# Altium PCB ali_sedighin.PcbDoc
Units mm, origin at the board's own origin, x right, y up, seen from the top; angles counter-clockwise.
Board outline 91.56 x 65.16 mm, 2 copper layers (Top Layer, Bottom Layer); 28 components, 23 nets, 114 pads, 36 vias.
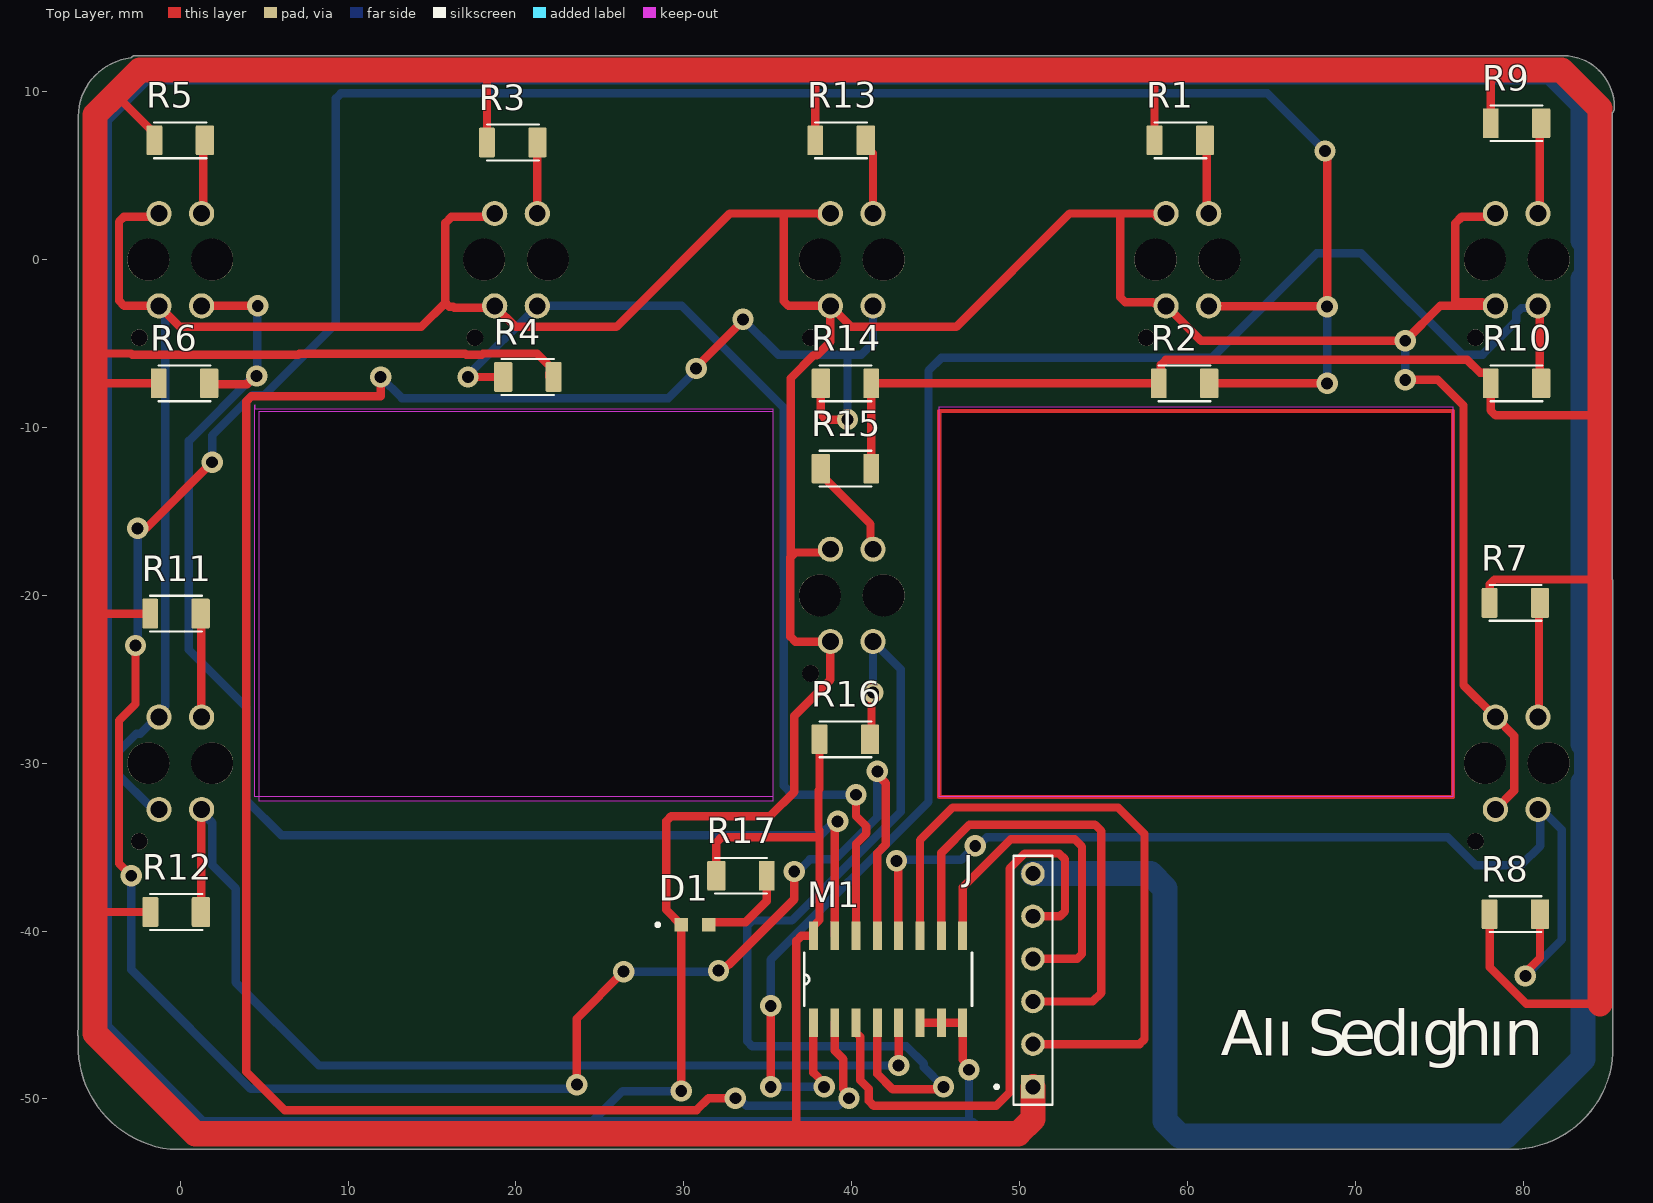
[diagram p0: Top Layer view]
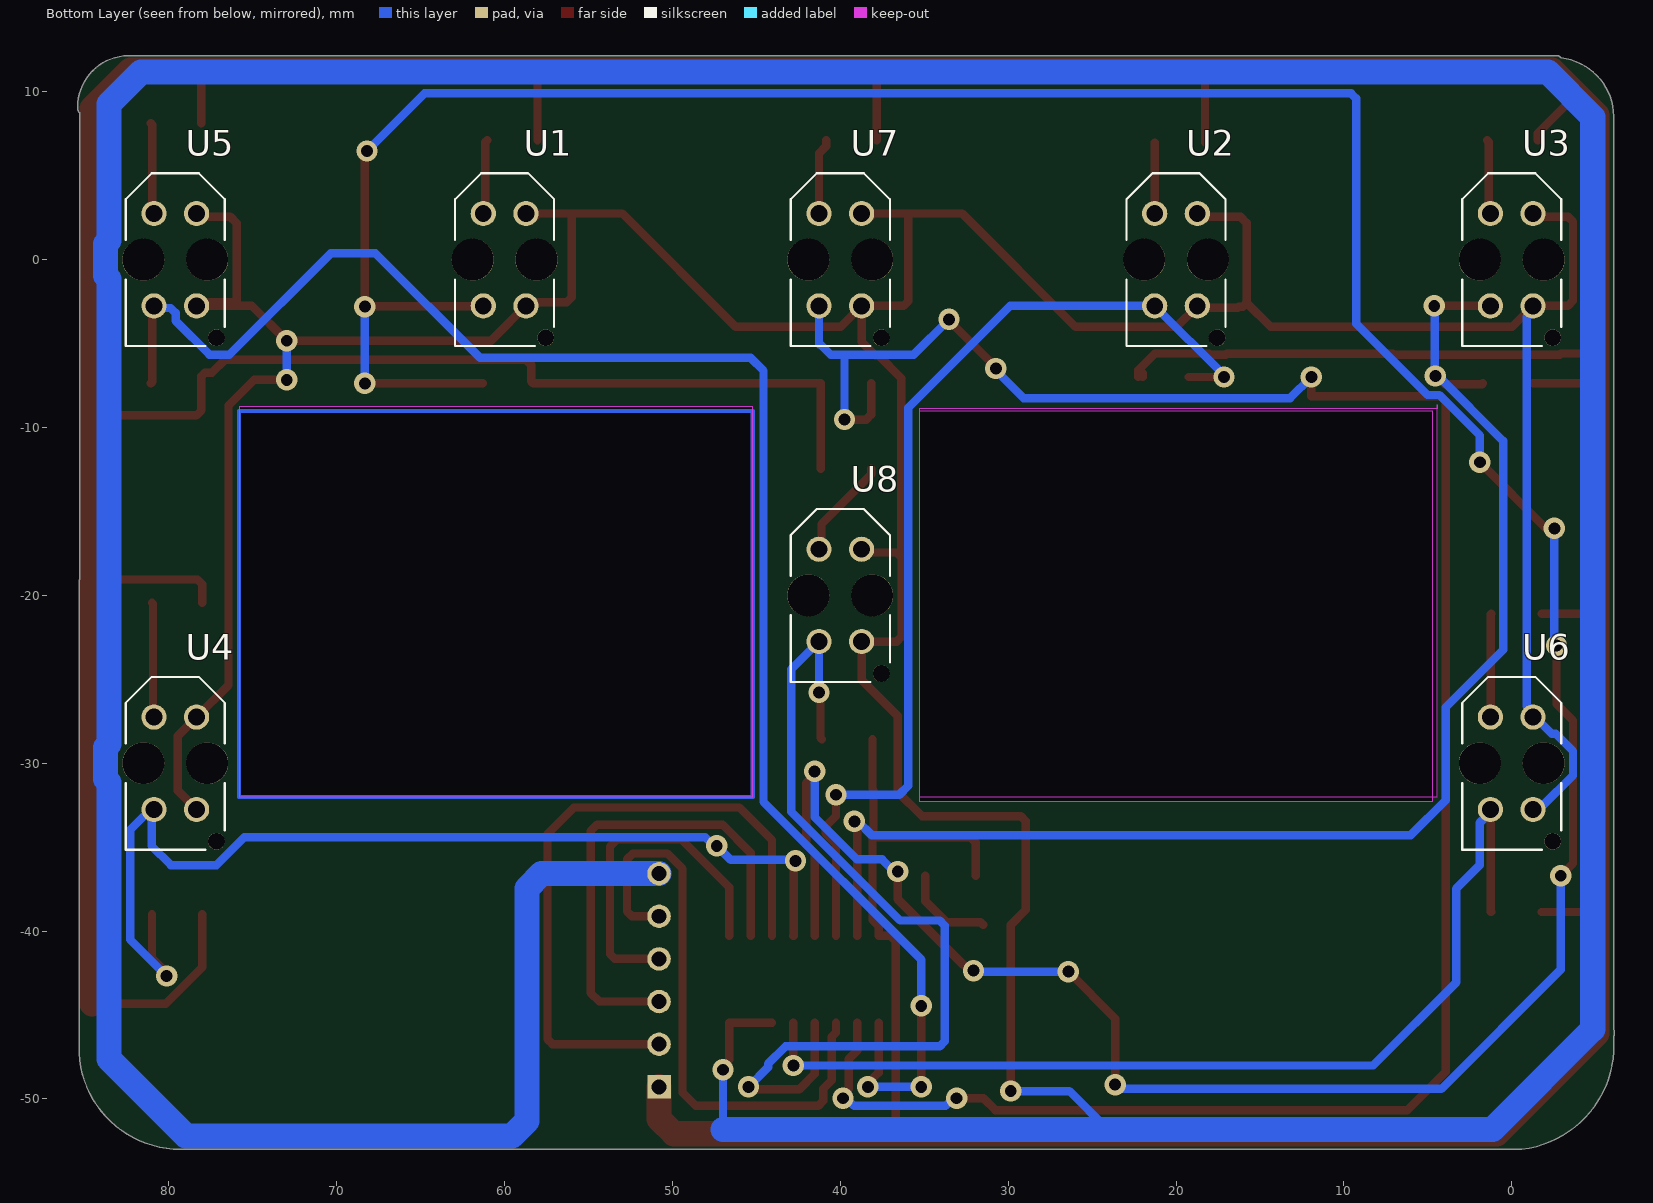
[diagram p1: Bottom Layer view, seen from below]
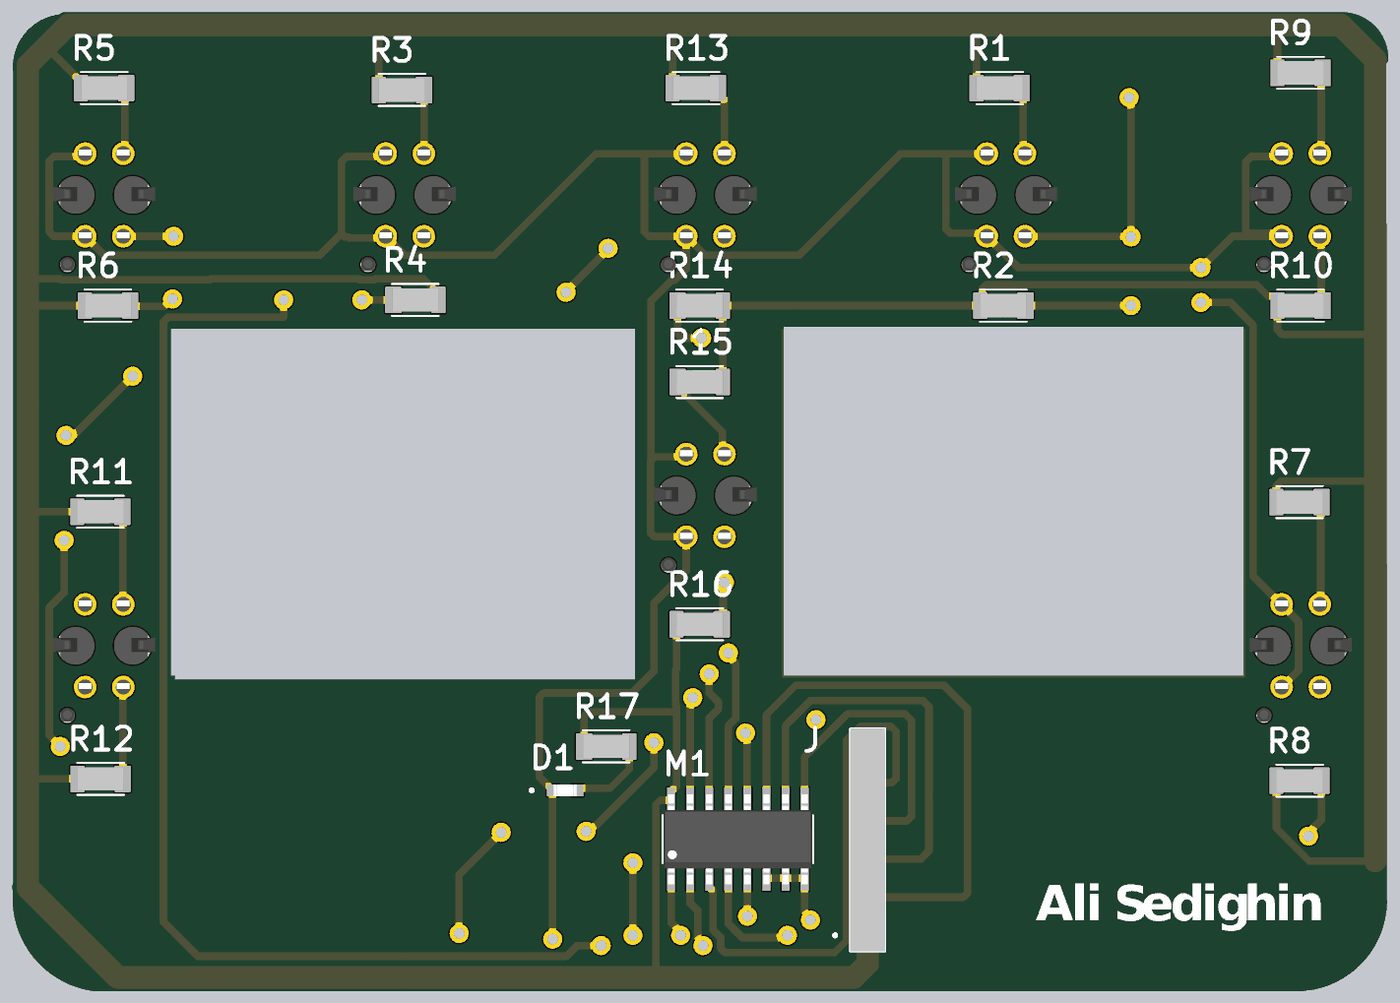
[diagram p2: 3D render of the assembled board from above, using the file's embedded part models]
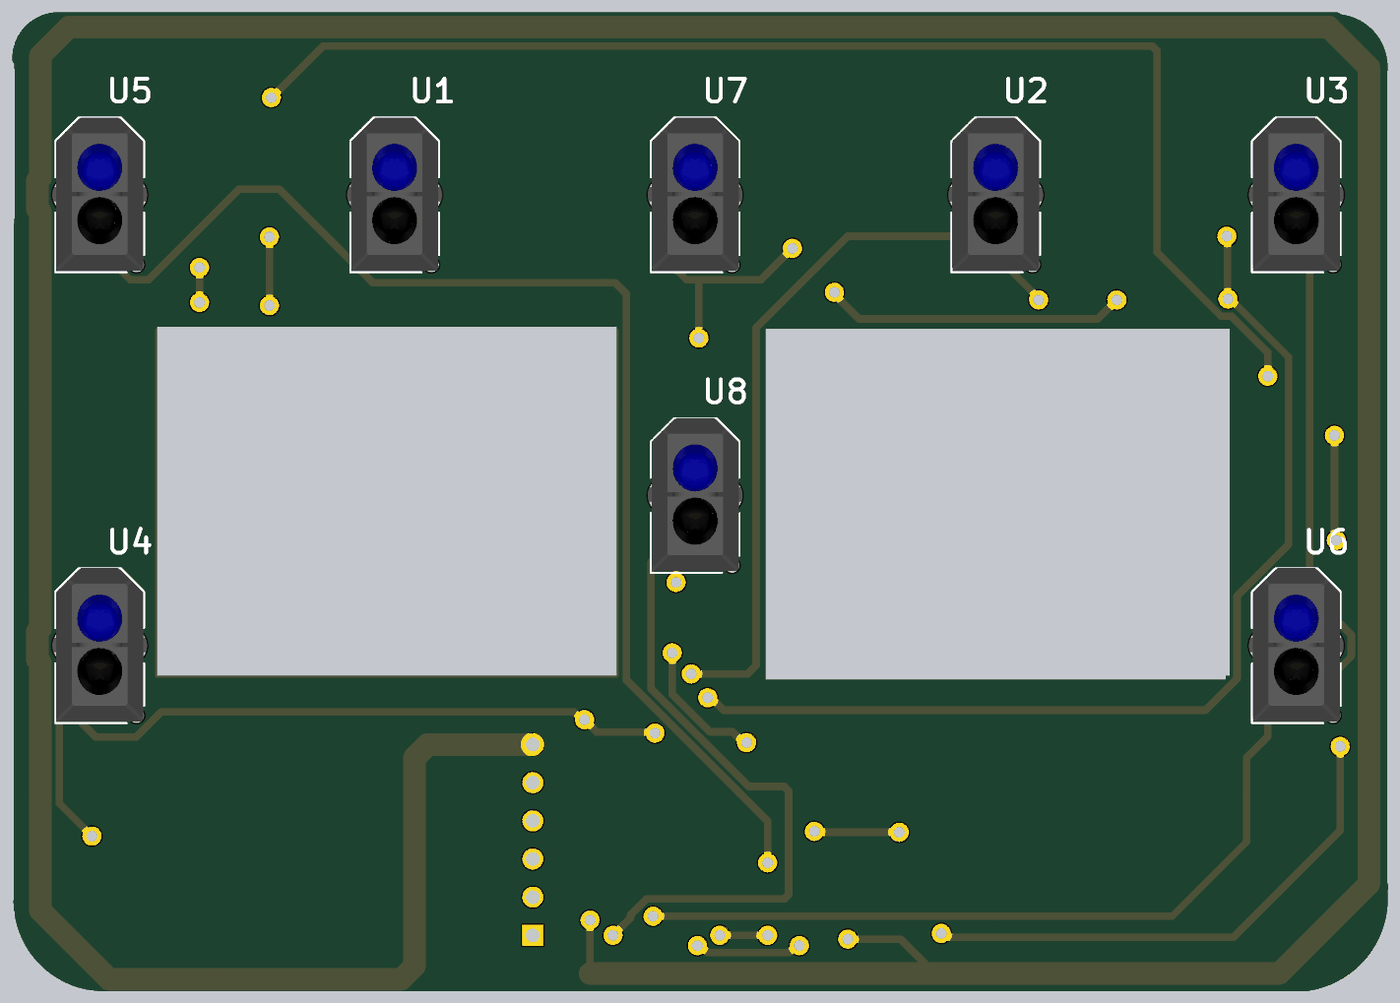
[diagram p3: 3D render of the assembled board from below, using the file's embedded part models]

## Layer stack, top to bottom
Top Solder: solder mask 0.0102, Solder Resist, Dk 3.5
Top Layer: signal copper 0.0356
Dielectric 1: dielectric 0.32, FR-4, Dk 4.8
Bottom Layer: signal copper 0.0356
Bottom Solder: solder mask 0.0102, Solder Resist, Dk 3.5

## Board outline
-0.608,-52.999 cw(c0.127,-46.824) -6.07,-46.296 cw(c-5.584,-46.071) -6.065,-45.836 -6.065,8.242 cw(c-2.54,8.509) -2.947,12.021 cw(c-2.667,11.811) -2.667,12.161 82.424,12.161 cw(c82.427,12.079) 82.432,12.161 cw(c82.36,9.081) 85.44,9.081 cw(c83.759,9.07) 85.44,9.033 cw(c85.248,9.021) 85.44,9.017 cw(c85.091,9.017) 85.313,8.747 85.354,-46.873 cw(c79.317,-46.961) 79.317,-52.999
cut-out: 45.212,-8.763 75.819,-8.763 75.819,-32.004 45.212,-32.004
cut-out: 4.699,-9.017 35.306,-9.017 35.306,-32.258 4.699,-32.258
cut-out: 4.445,-8.89 35.306,-8.89 35.306,-32.004 4.445,-32.004 4.445,-8.636

## Design rules (kind name [scope] priority, off if disabled: settings)
Clearance [All] p1: gap=0.254 ignorepadtopadclearanceinfootprint=FALSE except(0: Arc-Hole Track-Hole SMDPad-Hole THPad-Hole Via-Hole Fill-Hole Poly-Hole Region-Hole Text-Hole)
PolygonConnect [All] p1: connectstyle=Relief reliefconductorwidth=0.254 reliefentries=4 polygonreliefangle="90 Angle" airgapwidth=0.254
RoutingVias [All] p1: holewidth=0.711 width=1.27 viastyle="Through Hole" minholewidth=0.711 minwidth=1.27 maxholewidth=0.711 maxwidth=1.27
SolderMaskExpansion [All] p1: expansion=0.102 istentingtop=FALSE
Width [All] p1: maxlimit=1.5 minlimit=0.5 preferedwidth=1
30 further rules are at their usual default settings.

## Components (designator, comment, footprint, x,y, rotation, side; value= is the part's Value field where it differs from the comment)
D1 "KPT-1608ZGC" LED_KPT-1608ZGC 30.67,-39.624 r0 top
J "103321-6" TE_103321-6 50.8,-42.926 r90 top
M1 "74HC4051D" SOIC127P600X175-16N 42.164,-42.875 r90 top
R1 "" RESC3115X65N 59.579,7.112 r180 top
R2 "" RESC3115X65N 59.833,-7.366 r180 top
R3 "" RESC3115X65N 19.812,6.985 r180 top
R4 "" RESC3115X65N 20.701,-6.985 r0 top
R5 "" RESC3115X65N -0.001,7.112 r180 top
R6 "" RESC3115X65N 0.253,-7.366 r180 top
R7 "" RESC3115X65N 79.542,-20.447 r180 top
R8 "" RESC3115X65N 79.542,-38.989 r180 top
R9 "" RESC3115X65N 79.609,8.128 r180 top
R10 "" RESC3115X65N 79.609,-7.366 r180 top
R11 "" RESC3115X65N -0.254,-21.082 r180 top
R12 "" RESC3115X65N -0.238,-38.862 r180 top
R13 "" RESC3115X65N 39.37,7.112 r180 top
R14 "" RESC3115X65N 39.624,-7.366 r0 top
R15 "" RESC3115X65N 39.624,-12.446 r0 top
R16 "" RESC3115X65N 39.624,-28.575 r180 top
R17 "1879462-3" RESC3115X65N 33.401,-36.703 r0 top
U1 "TCRT5000" OPTO_TCRT5000 60,0 r90 bottom
U2 "TCRT5000" OPTO_TCRT5000 20,0 r90 bottom
U3 "TCRT5000" OPTO_TCRT5000 0,0 r90 bottom
U4 "TCRT5000" OPTO_TCRT5000 79.619,-30 r90 bottom
U5 "TCRT5000" OPTO_TCRT5000 79.619,0 r90 bottom
U6 "TCRT5000" OPTO_TCRT5000 0,-30 r90 bottom
U7 "TCRT5000" OPTO_TCRT5000 40,0 r90 bottom
U8 "TCRT5000" OPTO_TCRT5000 40,-20 r90 bottom

## Footprints (in the part's own frame and the unit in brackets; to place one, negate y for a bottom-side part, rotate by r counter-clockwise, add the part's x,y. Pads: shape width x height; smd on the part's side, far side on the other; paste and mask are expansions set on the pad)
LED_KPT-1608ZGC [mm]
  rect 0.8x0.8 smd: 1(0.825,0) 2(-0.825,0)
  silkscreen extent -2.32,-0.1 -2.12,0.1, body extent -0.8,-0.4 0.8,0.4, height 1.1
OPTO_TCRT5000 [mm]
  round 1.5 hole 1: A(2.75,1.27) CATH(2.75,-1.27) COLL(-2.75,1.27) E(-2.75,-1.27)
  round 1 hole 1 unplated: ""(-4.65,-2.45)
  round 2.5 hole 2.5 unplated: ""(0,-1.9) ""(0,1.9)
  silkscreen extent -5.15,-2.95 5.15,2.95, body extent -5.04,-3.4 5.16,3.4, height 7.2
RESC3115X65N [mm]
  rrect14% 1.09x1.77 smd: 1(-1.465,0)
  rrect14% 0.94x1.77 smd: 2(1.54,0)
  silkscreen extent -1.55,-1.06 1.55,1.06, body extent -1.55,-0.77 1.55,0.77, height 0.53
SOIC127P600X175-16N [mil]
  rect 67x21 smd: 1(-102,175) 2(-102,125) 3(-102,75) 4(-102,25) 5(-102,-25) 6(-102,-75) 7(-102,-125) 8(-102,-175) 9(102,-175) 10(102,-125) 11(102,-75) 12(102,-25) 13(102,25) 14(102,75) 15(102,125) 16(102,175)
  silkscreen extent -62,-197 62,197, body extent -118,-195 118,195, height 69
TE_103321-6 [mm]
  rect 1.398x1.398 hole 0.89: 1(-6.35,0)
  round 1.398 hole 0.89: 2(-3.81,0) 3(-1.27,0) 4(1.27,0) 5(3.81,0) 6(6.35,0)
  silkscreen extent -7.42,-1.17 7.42,2.27, body extent -7.42,-1.17 7.42,1.17, height 10.58

## Part data
D1: "1.6x0.8mm Smd Chip Led Lamp", Package="0603 Kingbright", Availability="In Stock", Check_prices=https://www.snapeda.com/parts/KPT-1608ZGC/Kingbright/view-part/?ref=eda, MF=Kingbright, MP=KPT-1608ZGC, Price=None, SnapEDA_Link=https://www.snapeda.com/parts/KPT-1608ZGC/Kingbright/view-part/?ref=snap
J: "Pin 06 MODII HDR SRST B / A .100CL 6 POS", Package=None, Availability=Unavailable, MF="TE Connectivity", Mouser-Purchase-URL=https://snapeda.com/shop?store=Mouser&id=4238467, MP=103321-6, Price=None, SnapEDA_Link=https://www.snapeda.com/parts/103321-6/TE%20Connectivity/view-part/4238467/?ref=snap
M1: "1 Circuit IC Switch 8:1 130Ohm 16-SOIC", Package="SOIC-16 Toshiba", Availability="In Stock", Check_prices=https://www.snapeda.com/parts/74HC4051D/Toshiba/view-part/?ref=eda, MF=Toshiba, MP=74HC4051D, Price=None, Purchase-URL=https://pricing.snapeda.com/search/part/74HC4051D/?ref=eda, SnapEDA_Link=https://www.snapeda.com/parts/74HC4051D/Toshiba/view-part/?ref=snap
R1 R2 R3 R4 R5 R6 R7 R8 R9 R10 R11 R12 R13 R14 R15 R16: library part 1879462-3, "RL73H 2B R12 1% 5K RL", Package=None, Availability=Unavailable, MP=1879462-3, Price=None
R17: "RL73H 2B R12 1% 5K RL", Package=None, Availability=Unavailable, MP=1879462-3, Price=None
U1 U2 U3 U4 U5 U6 U7 U8: "950 nm 60 mA Through Hole Reflective Optical Sensor with Transistor Output", Package=None, Availability=Unavailable, MP=TCRT5000, Price=None

## Via types
v1: diameter 1.27, hole 0.711, Top Layer to Bottom Layer, 36 vias

## Nets (pads, with @x,y where several pads share a name; then routed paths per layer and width w, separated by ;. In a path a pad name is that pad's centre, name@x,y a point inside that pad or via, vN(x,y) a via of type N, cw(c..) or ccw(c..) an arc to the next point about the centre after c; other vN are vias at no path point)
+5: J.1 M1.16 R1.2 R2.2 R3.2 R4.2 R5.2 R6.2 R7.2 R8.2 R9.2 R10.2 R11.2 R12.2 R13.2 R14.2 R15.2 R16.2 R17.1 | length 422.9
  Top Layer w0.5: -5.08,-38.862 R12.2 ; -5.08,-21.209 -4.953,-21.082 R11.2 ; -5.08,-7.366 R6.2 ; -5.08,-5.588 -2.932,-5.588 -2.866,-5.654 7.027,-5.654 7.089,-5.592 16.982,-5.592 17.044,-5.654 17.966,-5.654 18.032,-5.588 21.259,-5.588 22.241,-6.57 R4.2 ; -3.746,9.97 -3.746,9.732 -1.541,7.527 R5.2 ; 17.716,11.303 18.272,10.747 R3.2 ; R4.2@21.987,-6.985 R4.2@21.987,-6.765 ; R17.1 31.936,-34.71 32.229,-34.417 37.957,-34.417 38.084,-34.29 ; 36.703,-52.07 36.703,-40.577 36.996,-40.284 M1.16 37.719,-39.7 38.084,-39.335 38.084,-34.29 ; R13.2 37.83,11.287 37.846,11.303 ; R16.2 38.084,-31.541 38.025,-31.6 38.025,-33.932 38.084,-33.991 38.084,-34.29 ; R15.2 R14.2 R2.2 58.42,-7.239 58.42,-6.262 58.713,-5.969 76.672,-5.969 77.434,-6.731 77.849,-6.731 78.069,-6.951 R10.2 78.069,-8.978 78.362,-9.271 84.455,-9.271 84.582,-9.398 ; 57.912,11.303 58.039,11.176 R1.2 ; 77.978,11.303 78.069,11.212 R9.2 ; R8.2 78.002,-42.148 80.177,-44.323 84.582,-44.323 ; R7.2 78.002,-19.343 78.295,-19.05 84.455,-19.05 84.582,-19.177
  Top Layer w1.5: J.1 50.8,-51.191 49.921,-52.07 36.703,-52.07 0.889,-52.07 -5.08,-46.101 -5.08,-38.862 -5.08,-21.209 -5.08,-7.366 -5.08,-5.588 -5.08,8.636 -3.746,9.97 -2.413,11.303 17.716,11.303 18.272,11.303 37.846,11.303 57.912,11.303 77.978,11.303 82.296,11.303 84.582,9.017 84.582,-9.398 84.582,-19.177 84.582,-44.323
ARDU1: J.2 M1.11 | length 39.5
  Top Layer w0.5: M1.11 44.069,-34.579 46.013,-32.635 55.876,-32.635 57.443,-34.202 57.443,-46.443 57.15,-46.736 J.2
ARDU2: J.3 M1.10 | length 29.3
  Top Layer w0.5: M1.10 45.339,-35.333 47.017,-33.655 54.483,-33.655 54.872,-34.044 54.872,-43.68 54.356,-44.196 J.3
ARDU3: J.4 M1.9 | length 20.8
  Top Layer w0.5: M1.9 46.609,-37.398 49.471,-34.536 53.293,-34.536 53.721,-34.964 53.721,-41.363 53.428,-41.656 J.4
GND: D1.2 J.6 M1.6 M1.7 M1.8 U1.CATH U1.E U2.CATH U2.E U3.CATH U3.E U4.CATH U4.E U5.CATH U5.E U6.CATH U6.E U7.CATH U7.E U8.CATH U8.E | length 579.9
  Top Layer w0.5: U3.CATH -1.461,2.559 -3.361,2.559 -3.654,2.266 -3.654,-2.442 -3.346,-2.75 U3.E -0.016,-4.004 14.349,-4.004 15.788,-2.565 ; U2.CATH 18.539,2.559 16.148,2.559 15.788,2.199 15.788,-2.565 ; v1(29.845,-49.53) D1.2 28.956,-38.735 28.956,-33.44 29.249,-33.147 35.13,-33.147 36.576,-31.701 36.576,-27.178 38.73,-25.024 U8.E 36.639,-22.75 36.346,-22.457 36.346,-17.734 36.639,-17.441 38.539,-17.441 U8.CATH ; 36.375,-17.705 36.375,-7.052 37.736,-5.691 37.928,-5.691 38.73,-4.89 U7.E ; U7.CATH@38.178,2.559 38.539,2.559 U7.CATH 38.539,2.75 38.178,2.75 35.941,2.75 ; M1.6 M1.7 M1.8 46.609,-47.671 ; U1.CATH@58.178,2.559 58.539,2.559 U1.CATH 58.539,2.75 58.178,2.75 56.007,2.75 ; v1(72.98,-7.157) 74.926,-7.157 76.45,-8.681 76.45,-25.351 U4.CATH 79.473,-28.374 79.473,-31.626 U4.E ; U5.E U5.E@78.22,-2.75 ; U5.CATH 78.158,2.559 76.346,2.559 75.965,2.178 75.965,-2.54 77.556,-2.54 77.575,-2.559 78.028,-2.559 U5.E@78.22,-2.75 ; 15.788,-2.565 16.017,-2.794 16.256,-2.794 16.32,-2.858 18.622,-2.858 U2.E 19.984,-4.004 25.98,-4.004 32.734,2.75 35.941,2.75 ; 35.941,2.75 35.941,-2.457 36.234,-2.75 U7.E ; U7.E 39.984,-4.004 46.228,-4.004 52.982,2.75 56.007,2.75 ; 56.007,2.75 56.007,-2.247 56.3,-2.54 57.937,-2.54 57.956,-2.559 58.539,-2.559 60.81,-4.83 v1(72.98,-4.83) 75.06,-2.75 75.965,-2.75 78.01,-2.75 U5.E@78.22,-2.75
  Bottom Layer w0.5: U6.E -1.461,-32.559 -1.822,-32.559 -3.654,-30.727 -3.654,-29.273 -2.627,-28.246 -2.395,-28.246 -1.399,-27.25 U6.CATH -1.27,-26.979 -0.889,-26.598 -0.889,-3.402 -1.27,-3.021 U3.E ; 24.066,-51.816 26.352,-49.53 v1(29.845,-49.53) ; 46.99,-51.816 v1(46.99,-48.26) ; v1(72.98,-7.157) v1(72.98,-4.83)
  Bottom Layer w1.5: 46.99,-51.816 24.066,-51.816 1.143,-51.816 -4.826,-45.847 -4.826,8.509 -2.159,11.176 81.661,11.176 83.566,9.271 83.566,1.141 83.773,0.934 83.773,-0.934 83.566,-1.141 83.566,-28.859 83.773,-29.066 83.773,-30.934 83.566,-31.141 83.566,-47.625 78.994,-52.197 59.553,-52.197 58.674,-51.318 58.674,-37.455 57.795,-36.576 J.6
NetD1_1: D1.1 R17.2 | length 5.5
  Top Layer w0.5: D1.1 31.645,-39.474 33.678,-39.474 34.941,-38.211 R17.2
NetR1_1: R1.1 U1.A | length 4.5
  Top Layer w0.5: R1.1 61.157,6.999 61.157,2.863 U1.A
NetR3_1: R3.1 U2.A | length 4.2
  Top Layer w0.5: U2.A 21.274,2.753 21.274,6.981 R3.1
NetR5_1: R5.1 U3.A | length 4.4
  Top Layer w0.5: U3.A 1.367,2.847 1.367,7.015 R5.1
NetR7_1: R7.1 U4.A | length 6.9
  Top Layer w0.5: U4.A 80.948,-27.191 80.948,-20.506 R7.1
NetR9_1: R9.1 U5.A | length 5.5
  Top Layer w0.5: U5.A 80.981,2.842 80.981,8.036 R9.1
NetR11_1: R11.1 U6.A | length 6.2
  Top Layer w0.5: R11.1 1.241,-21.111 1.241,-27.221 U6.A
NetR13_1: R13.1 U7.A | length 4.5
  Top Layer w0.5: R13.1 40.835,6.772 41.27,6.337 U7.A
NetR15_1: R15.1 U8.A | length 6.1
  Top Layer w0.5: R15.1 38.159,-12.786 41.123,-15.75 41.123,-17.103 U8.A
OUT: J.5 M1.3 | length 36.1
  Top Layer w0.5: M1.3 40.259,-46.05 40.513,-46.304 40.513,-48.895 41.021,-49.403 41.021,-50.122 41.314,-50.415 48.606,-50.415 49.399,-49.622 49.399,-36.276 50.302,-35.373 52.36,-35.373 52.705,-35.718 52.705,-38.823 52.412,-39.116 J.5
s1: M1.13 R2.1 U1.COLL | length 217.2
  Top Layer w0.5: v1(-2.921,-36.703) -3.654,-35.97 -3.654,-27.454 -2.667,-26.467 v1(-2.667,-22.987) ; v1(-2.54,-16.002) -2.04,-16.002 v1(1.897,-12.065) ; v1(23.622,-49.149) 23.622,-45.212 v1(26.416,-42.418) ; v1(32.067,-42.355) 32.276,-42.355 32.628,-42.002 32.674,-42.002 36.576,-38.1 v1(36.576,-36.449) ; M1.13 41.529,-35.346 42.027,-34.848 42.027,-31.187 41.529,-30.688 v1(41.529,-30.48) ; U1.COLL 61.292,-2.772 68.304,-2.772 v1(68.326,-2.794) 68.326,6.35 v1(68.199,6.477) ; R2.1 v1(68.326,-7.366)
  Bottom Layer w0.5: v1(-2.921,-36.703) -2.921,-42.291 4.191,-49.403 23.368,-49.403 v1(23.622,-49.149) ; v1(-2.667,-22.987) -2.54,-22.86 v1(-2.54,-16.002) ; v1(1.897,-12.065) 1.897,-10.471 4.306,-8.063 5.018,-8.063 9.271,-3.81 9.271,9.613 9.564,9.906 64.77,9.906 v1(68.199,6.477) ; v1(26.416,-42.418) 32.004,-42.418 v1(32.067,-42.355) v1@32.131,-42.291 ; v1(36.576,-36.449) 36.784,-36.449 37.506,-35.728 39.015,-35.728 41.529,-33.214 v1(41.529,-30.48) ; v1(68.326,-7.366) v1(68.326,-2.794)
s2: M1.14 R4.1 U2.COLL | length 61.2
  Top Layer w0.5: v1(17.145,-6.985) R4.1 ; M1.14 40.259,-34.798 40.877,-34.18 40.877,-33.765 40.259,-33.147 v1(40.259,-31.877)
  Bottom Layer w0.5: v1(17.145,-6.985) 17.145,-6.875 U2.COLL 29.879,-2.75 35.941,-8.812 35.941,-31.33 36.488,-31.877 v1(40.259,-31.877)
s3: M1.15 R6.1 U3.COLL | length 82.4
  Top Layer w0.5: U3.COLL v1(4.616,-2.75) ; R6.1 1.762,-7.41 3.991,-7.41 4.477,-6.924 v1(4.547,-6.924) ; M1.15 38.989,-33.843 39.164,-33.668 v1(39.164,-33.46)
  Bottom Layer w0.5: v1(4.547,-6.924) 4.378,-6.924 0.508,-10.794 0.508,-23.241 3.941,-26.674 3.941,-32.213 6.018,-34.29 38.125,-34.29 38.955,-33.46 v1(39.164,-33.46) ; v1@4.581,-6.889 4.581,-2.785 v1(4.616,-2.75)
s4: M1.12 R8.1 U4.COLL | length 62.4
  Top Layer w0.5: v1(42.672,-35.814) 42.782,-35.924 42.782,-40.268 M1.12 ; v1(80.137,-42.672) 80.137,-42.464 81.007,-41.593 R8.1
  Bottom Layer w0.5: v1(42.672,-35.814) 42.729,-35.757 46.525,-35.757 v1(47.362,-34.921) 47.536,-34.921 48.04,-34.417 75.516,-34.417 77.167,-36.068 79.883,-36.068 81.026,-34.925 81.026,-32.887 U4.COLL 81.092,-32.75 82.312,-33.97 82.312,-40.497 v1(80.137,-42.672)
s5: M1.1 R10.1 U5.COLL | length 101.7
  Top Layer w0.5: v1(35.179,-49.276) v1(35.179,-44.45) ; M1.1 37.719,-48.429 38.358,-49.068 v1(38.358,-49.276) ; U5.COLL 80.981,-2.842 80.981,-7.274 R10.1
  Bottom Layer w0.5: v1(35.179,-49.276) v1(38.358,-49.276) ; v1(35.179,-44.45) 35.179,-41.696 44.577,-32.298 44.577,-6.604 45.339,-5.842 61.468,-5.842 67.691,0.381 70.358,0.381 76.393,-5.654 77.585,-5.654 79.603,-3.636 79.603,-3.171 79.896,-2.878 80.761,-2.878 U5.COLL
s6: M1.5 R12.1 U6.COLL | length 61.4
  Top Layer w0.5: R12.1 1.249,-38.84 1.249,-32.771 U6.COLL ; v1(42.799,-48.006) M1.5
  Bottom Layer w0.5: U6.COLL 1.27,-32.908 1.905,-33.543 1.905,-36.068 3.302,-37.465 3.302,-43.053 8.255,-48.006 v1(42.799,-48.006)
s7: M1.2 R14.1 U7.COLL | length 134.6
  Top Layer w0.5: v1@11.811,-6.858 v1(11.938,-6.985) 11.938,-8.132 4.236,-8.132 3.937,-8.431 3.937,-48.387 6.219,-50.669 30.76,-50.669 31.471,-49.958 v1(33.067,-49.958) ; v1(30.734,-6.477) 30.734,-6.413 33.528,-3.619 v1(33.528,-3.556) ; R14.1 38.159,-9.232 38.452,-9.525 v1(39.751,-9.525) ; M1.2 38.989,-47.117 39.497,-47.625 39.497,-49.402 39.844,-49.749 v1(39.844,-49.958)
  Bottom Layer w0.5: v1(11.938,-6.985) 13.204,-8.251 29.087,-8.251 30.734,-6.604 v1(30.734,-6.477) ; v1(33.067,-49.958) 33.275,-49.958 33.732,-50.415 39.178,-50.415 39.636,-49.958 v1(39.844,-49.958) ; v1(33.528,-3.556) 35.626,-5.654 39.751,-5.654 ; v1(39.751,-9.525) 39.751,-5.654 ; 41.27,-5.031 U7.COLL ; 41.27,-4.958 40.574,-5.654 39.751,-5.654
s8: M1.4 R16.1 U8.COLL | length 55.9
  Top Layer w0.5: R16.1 41.179,-28.484 41.179,-25.877 v1(41.27,-25.786) ; M1.4 41.529,-48.514 42.438,-49.423 45.319,-49.423 v1(45.466,-49.276)
  Bottom Layer w0.5: v1(41.27,-25.786) U8.COLL 42.926,-24.406 42.926,-32.883 36.439,-39.37 34.076,-39.37 33.782,-39.664 33.782,-46.57 34.075,-46.863 43.267,-46.863 44.295,-47.891 44.295,-48.105 v1(45.466,-49.276)
pads on no net: U1. U2. U3. U4. U5. U6. U7. U8.

## Other copper
Multi-Layer:
  lines w0.254: 45.212,-32.004 75.819,-32.004 75.819,-9.017 45.212,-9.017 45.212,-32.004

## Silkscreen, mask and mechanical layers (free items; w line width, h text height)
Top Overlay:
  text "A" at 61.981,-48.289 h4.63
  text "l" at 64.343,-48.289 h4.63
  text "i" at 65.316,-48.289 h4.63
  text "S" at 67.176,-48.29 h4.63
  text "e" at 68.993,-48.29 h4.63
  text "d" at 70.938,-48.29 h4.63
  text "i" at 73.009,-48.289 h4.63
  text "g" at 73.986,-48.293 h4.63
  text "h" at 75.841,-48.289 h4.63
  text "i" at 77.913,-48.289 h4.63
  text "n" at 78.885,-48.289 h4.63
Mechanical 1:
  lines w0.7: -6.731,-83.693 -6.223,-83.185 ; 85.598,-83.693 85.725,-83.82